# Altium PCB Control_core_PCB.PcbDoc
Units mm, origin at the board's own origin, x right, y up, seen from the top; angles counter-clockwise.
Board outline 38.1 x 22.86 mm, 2 copper layers (Top Layer, Bottom Layer), stack 1.071 mm thick; 23 components, 82 nets, 111 pads, 40 vias.
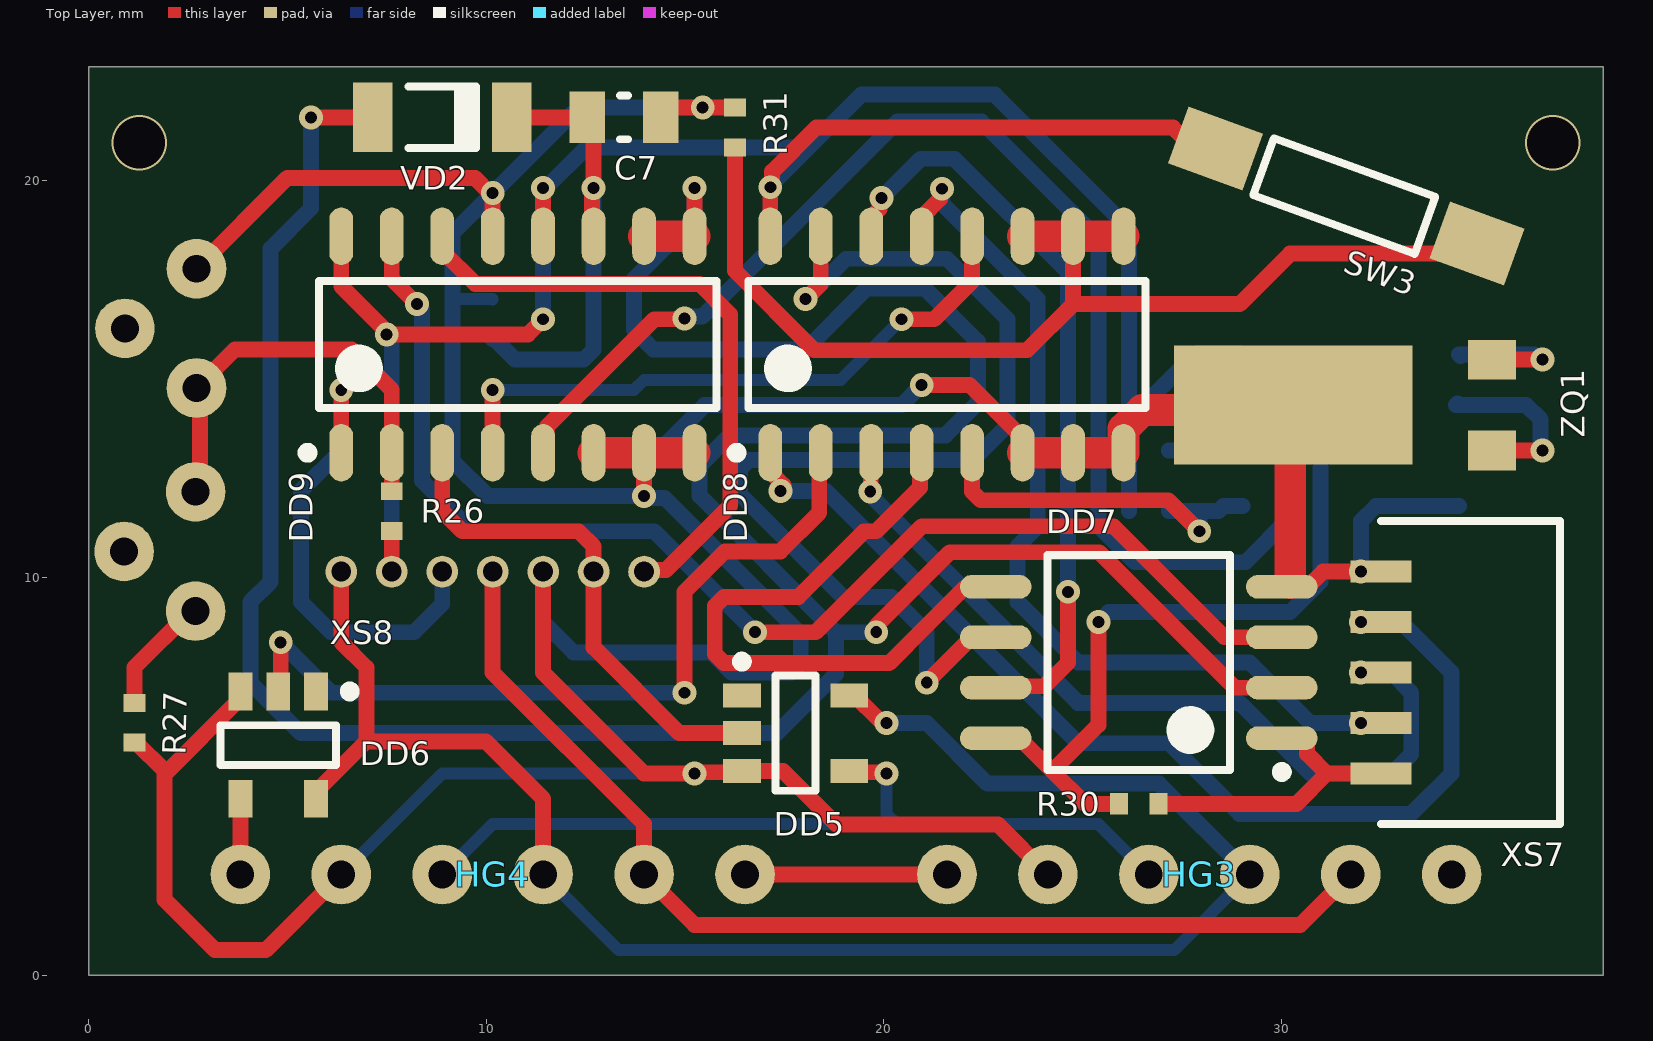
[diagram p0: Top Layer view]
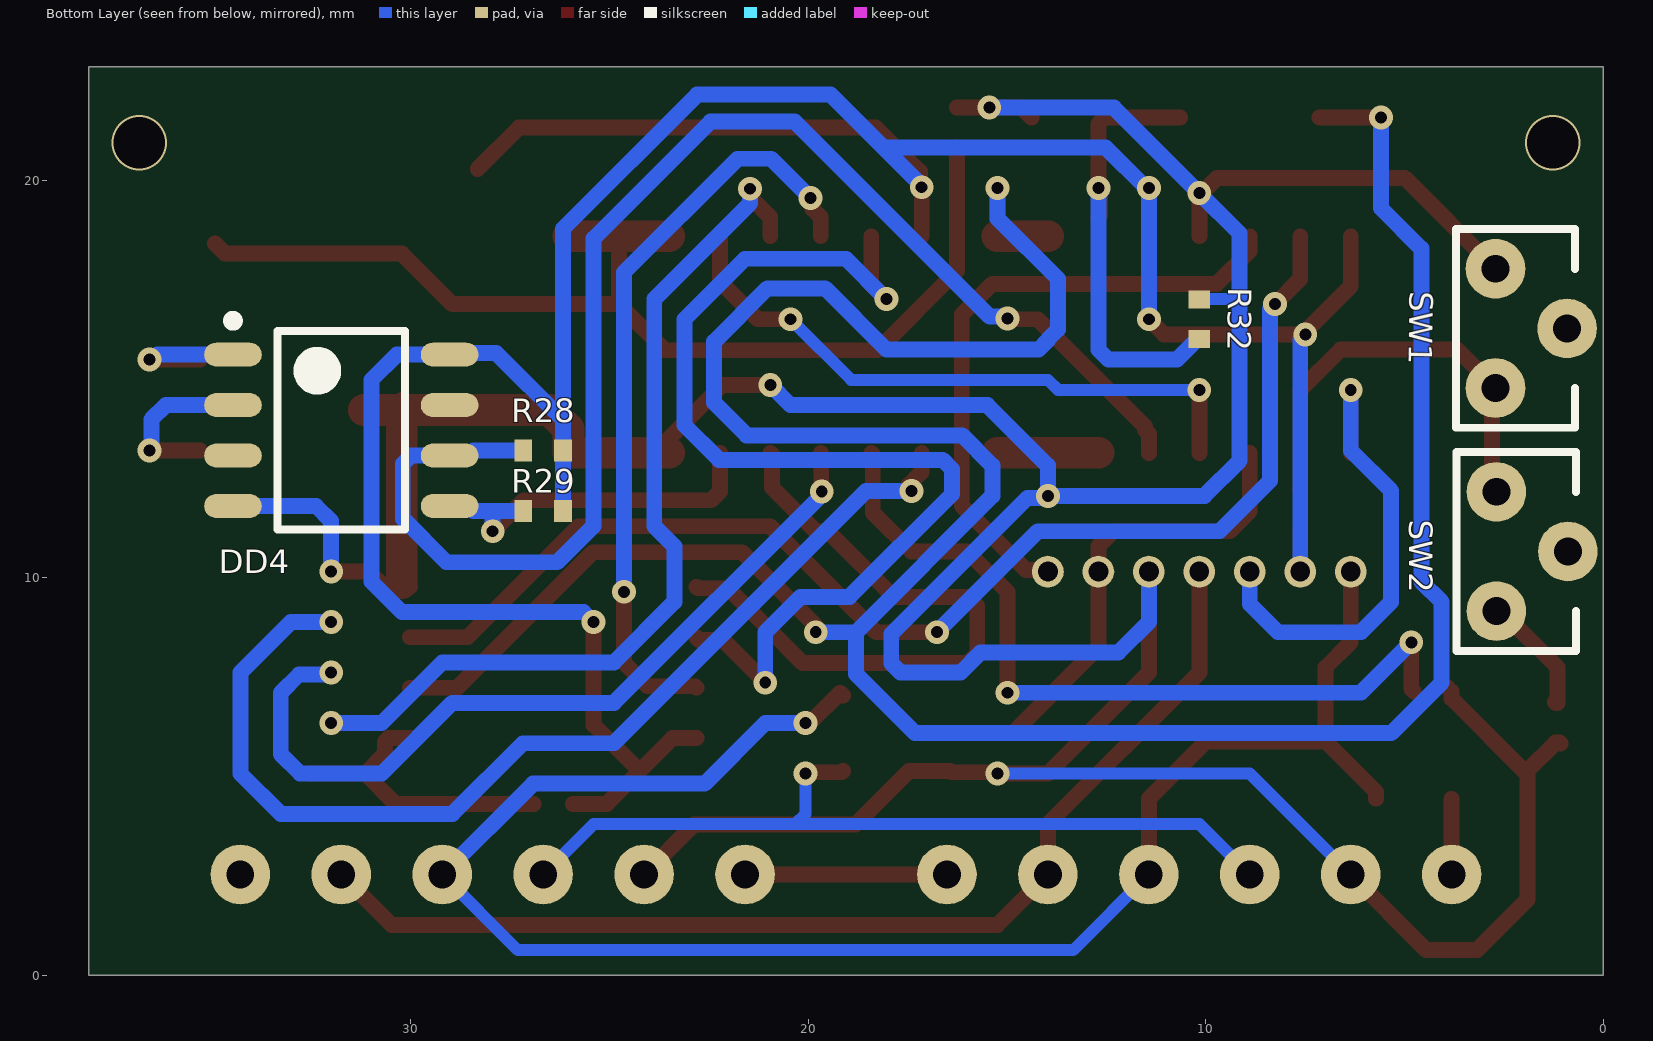
[diagram p1: Bottom Layer view, seen from below]

## Layer stack, top to bottom
Top Solder: solder mask 0.0102, Solder Resist, Dk 3.5
Top Layer: signal copper 0.0356
Dielectric 1: dielectric 1, FR-4, Dk 4.8
Bottom Layer: signal copper 0.0356
Bottom Solder: solder mask 0.0102, Solder Resist, Dk 3.5

## Board outline
0,0 38.1,0 38.1,22.86 0,22.86
cut-out: -25.4,-73.66 -25.146,-73.66 -25.146,-73.406 -25.4,-73.406
cut-out: -25.4,-73.66 -25.146,-73.66 -25.146,-73.406 -25.4,-73.406
cut-out: -25.4,-73.66 -25.146,-73.66 -25.146,-73.406 -25.4,-73.406

## Design rules (kind name [scope] priority, off if disabled: settings)
Clearance [All] p1: gap=0.254 ignorepadtopadclearanceinfootprint=FALSE
FanoutControl Fanout_LCC [All] p1 off: bgadir=Out bgaviamode=Centered fanoutstyle=Auto fanoutdirection=Alternating viagrid=0.025 // Protel DXP Scope 1 Expression Was: IsLCC   Fanout_LCC (Default Rule)
FanoutControl Fanout_BGA [All] p2 off: bgadir=Out bgaviamode=Centered fanoutstyle=Auto fanoutdirection=Alternating viagrid=0.025 // Protel DXP Scope 1 Expression Was: IsBGA   Fanout_BGA (Default Rule)
FanoutControl Fanout_SOIC [All] p3 off: bgadir=Out bgaviamode=Centered fanoutstyle=Auto fanoutdirection=Alternating viagrid=0.025 // Protel DXP Scope 1 Expression Was: IsSOIC   Fanout_SOIC (Default Rule)
FanoutControl Fanout_Default [All] p4: bgadir=Out bgaviamode=Centered fanoutstyle=Auto fanoutdirection=Alternating viagrid=0.025 // Fanout_Default (Default Rule)
FanoutControl Fanout_Small [All] p5 off: bgadir=Out bgaviamode=Centered fanoutstyle=Auto fanoutdirection=Alternating viagrid=0.025 // Protel DXP Scope 1 Expression Was: (CompPinCount < 5)   Fanout_Small (Default Rule)
PolygonConnect [All] p1: connectstyle=Relief reliefconductorwidth=0.254 reliefentries=4 polygonreliefangle="90 Angle" airgapwidth=0.254
RoutingVias [All] p1: holewidth=0.711 width=1.27 viastyle="Through Hole" minholewidth=0.711 minwidth=1.27 maxholewidth=0.711 maxwidth=1.27
SilkToSolderMaskClearance [All] p1 off: minsilkscreentomaskgap=0.254 clearancetoexposedcopper=TRUE // Protel DXP Scope 1 Expression Was: IsPad
SolderMaskExpansion [All] p1: expansion=0.102 istentingtop=FALSE
Width [All] p1: maxlimit=1 minlimit=0.15 preferedwidth=0.4
24 further rules are at their usual default settings.

## Components (designator, comment, footprint, x,y, rotation, side; value= is the part's Value field where it differs from the comment)
C7 "C0805" CHIP-0805 13.462,21.59 r0 top
DD4 "DS1337" SOIC-8 31.75,13.716 r180 bottom
DD5 "74LV1T34" SOT23-5 17.78,6.096 r0 top
DD6 "74LV1T34" SOT23-5 4.765,5.795 r270 top
DD7 "ATtiny85" SOIC-8-ATtiny85 26.416,7.874 r180 top
DD8 "CD4053" SOIC-16 21.59,15.875 r90 top
DD9 "CD4053" SOIC-16 10.795,15.875 r90 top
HG3 "HDSP-2000_SPI" HDSP-2000_SPI 34.29,2.54 r180 top
HG4 "HDSP-2000_SPI" HDSP-2000_SPI 16.51,2.54 r180 top
R26 "R0402" CHIP-0402 7.62,11.684 r270 top
R27 "R0402" CHIP-0402 1.143,6.358 r270 top
R28 "R0402" CHIP-0402 26.67,13.208 r180 bottom
R29 "R0402" CHIP-0402 26.67,11.684 r180 bottom
R30 "R0402" CHIP-0402 26.416,4.318 r180 top
R31 "R0402" CHIP-0402 16.256,21.336 r90 top
R32 "R0402" CHIP-0402 10.16,16.51 r90 bottom
SW1 "Button" BUTTON 2.707,17.78 r270 bottom
SW2 "Button" BUTTON 2.685,12.168 r270 bottom
SW3 "Switch" SWITCH 34.925,18.415 r160 top
VD2 "BAS85" DIOD_MELF 8.89,21.59 r180 top
XS7 "Prog_connector" Prog_connector 32.512,5.08 r90 top
XS8 "Socket_7" SOCKET_7 6.35,10.16 r0 top
ZQ1 "HZ" HZ 35.306,14.351 r90 top

## Footprints (in the part's own frame and the unit in brackets; to place one, negate y for a bottom-side part, rotate by r counter-clockwise, add the part's x,y. Pads: shape width x height; smd on the part's side, far side on the other; paste and mask are expansions set on the pad)
BUTTON [mm]
  round 1.5 hole 0.7: 1(0,0) 2(3,0) 3(1.5,1.8)
  silkscreen extent -1,-1 4,2
CHIP-0402 [mm] "Chip Resistor, 2-Leads, Body 1,00x0,50mm, IPC Medium Density"
  rect 0.45x0.55 smd: 1(-0.5,0) 2(0.5,0)
  body extent -0.5,-0.25 0.5,0.25, height 0.35
CHIP-0805 [mm] "Chip Resistor, 2-Leads, Body 2,00x1,25mm, IPC Medium Density"
  rect 0.9x1.3 smd: 1(-0.925,0) 2(0.925,0)
  silkscreen extent -0.1,-0.55 0.1,0.55, body extent -1,-0.63 1,0.63, height 0.7
DIOD_MELF [mm] "MELF Diode, 2-Leads, Body 3,50x1,53mm, IPC Medium Density"
  rect 1x1.75 smd: 1(-1.75,0) 2(1.75,0)
  silkscreen extent -0.85,-0.77 0.85,0.77, body extent -1.85,-0.8 1.85,0.8, height 1.59
HDSP-2000_SPI [mm]
  round 1.5 hole 0.7: 7(0,0) 8(2.54,0) 9(5.08,0) 10(7.62,0) 11(10.16,0) 12(12.7,0)
HZ [mm]
  rect 1x1.2 smd: 1(-1.143,0) 2(1.143,0)
  rect 3x6 smd: 3(0,5)
Prog_connector [mm]
  rect 0.55x1.524 smd: 1(0,0) 2(1.27,0) 3(2.54,0) 4(3.81,0) 5(5.08,0)
  silkscreen extent -1.27,-4.5 6.35,0
SOCKET_7 [mm]
  round 0.8 hole 0.5: 1(0,0) 2(1.27,0) 3(2.54,0) 4(3.81,0) 5(5.08,0) 6(6.35,0) 7(7.62,0)
SOIC-8 [mm] "SOIC, 8-Leads, Body 4,88x3,90mm, Pitch 1,27mm, IPC Medium Density"
  oval 1.45x0.6 smd: 1(-2.725,1.905) 2(-2.725,0.635) 3(-2.725,-0.635) 4(-2.725,-1.905) 5(2.725,-1.905) 6(2.725,-0.635) 7(2.725,0.635) 8(2.725,1.905)
  silkscreen extent -2.85,-2.5 1.6,2.88, body extent -2,-2.5 2,2.5, height 1.75
SOIC-8-ATtiny85 [mm] "SOIC, 8-Leads, Body 5,24x5,29mm, Pitch 1,27mm, IPC Medium Density"
  oval 1.8x0.6 smd: 1(-3.6,1.905) 2(-3.6,0.635) 3(-3.6,-0.635) 4(-3.6,-1.905) 5(3.6,-1.905) 6(3.6,-0.635) 7(3.6,0.635) 8(3.6,1.905)
  silkscreen extent -3.73,-2.7 2.3,2.88, body extent -2.7,-2.7 2.7,2.7, height 1.75
SOIC-16 [mm] "SOIC, 16-Leads, Body 9,90x3,90mm, Pitch 1,27mm, IPC Medium Density"
  oval 1.45x0.6 smd: 1(-2.725,4.445) 2(-2.725,3.175) 3(-2.725,1.905) 4(-2.725,0.635) 5(-2.725,-0.635) 6(-2.725,-1.905) 7(-2.725,-3.175) 8(-2.725,-4.445) 9(2.725,-4.445) 10(2.725,-3.175) 11(2.725,-1.905) 12(2.725,-0.635) 13(2.725,0.635) 14(2.725,1.905) 15(2.725,3.175) 16(2.725,4.445)
  silkscreen extent -2.85,-5 1.6,5.42, body extent -2,-5 2,5, height 1.75
SOT23-5 [mm] "SOT23, 5-Leads, Body 2,85x2,80mm, Pitch 0,95mm, IPC Medium Density"
  rect 0.95x0.6 smd: 1(-1.35,0.95) 2(-1.35,0) 3(-1.35,-0.95) 4(1.35,-0.95) 5(1.35,0.95)
  silkscreen extent -1.47,-1.45 0.5,1.92, body extent -0.87,-1.45 0.87,1.45, height 1.1
SWITCH [mm]
  rect 2x1.524 smd: 1(0,0) 2(7,0)

## Via types
v1: diameter 0.6, hole 0.3, Top Layer to Bottom Layer, 38 vias
v2: diameter 1.4, hole 1.3, Top Layer to Bottom Layer, 2 vias

## Nets (pads, with @x,y where several pads share a name; then routed paths per layer and width w, separated by ;. In a path a pad name is that pad's centre, name@x,y a point inside that pad or via, vN(x,y) a via of type N, cw(c..) or ccw(c..) an arc to the next point about the centre after c; other vN are vias at no path point)
+3V3: DD4.8 DD7.8 DD8.16 DD9.12 DD9.16 R26.2 R28.2 R29.2 R30.2 SW3.2 XS8.2 | length 82.7
  Top Layer w0.4: DD9.16 6.35,17.34 7.561,16.129 11.049,16.129 v1(11.43,16.51) ; XS8.2 R26.2 ; DD9.12 v1(11.43,19.812) ; DD8.16 v1(17.145,19.832) 17.193,19.88 17.193,20.225 18.304,21.336 27.274,21.336 SW3.2@28.315,20.295 ; DD7.8 23.416,5.969 24.242,5.143 ; v1(25.4,8.89) 25.4,6.302 24.242,5.143 ; R30.2 25.067,4.318 24.242,5.143
  Bottom Layer w0.4: v1(7.493,16.129) 7.62,16.002 XS8.2 ; v1(11.43,16.51) v1(11.43,19.812) 11.498,19.812 12.514,20.828 18.103,20.828 ; v1(17.145,19.832) 17.145,19.87 18.103,20.828 ; v1(25.4,8.89) 25.654,9.144 30.226,9.144 30.988,9.906 30.988,14.986 30.353,15.621 DD4.8 28.987,15.659 27.851,15.659 26.17,13.978 ; R29.2 R28.2 26.17,13.978 ; 18.103,20.828 19.436,22.161 22.797,22.161 26.17,18.788 26.17,13.978
+3V3_D: 
+3V3_S: 
+5: DD5.5 DD6.5 HG3.9 HG4.9 XS8.1 | length 44.8
  Top Layer w0.4: DD6.5 5.715,4.62 6.985,5.89 ; XS8.1 6.35,8.382 6.985,7.747 6.985,5.89 ; HG4.9 11.43,4.445 9.985,5.89 6.985,5.89 ; DD5.5 19.196,7.112 19.958,6.35 v1(20.066,6.35)
  Bottom Layer w0.3: HG4.9 13.335,0.635 27.305,0.635 HG3.9
  Bottom Layer w0.4: v1(20.066,6.35) 21.082,6.35 22.606,4.826 26.924,4.826 HG3.9
+5_D: 
+5_S: 
ADC_IN: DD7.3 DD9.15 | length 31.9
  Top Layer w0.4: DD9.15 7.62,17.526 v1(8.255,16.891) ; v1(16.764,8.636) 18.288,8.636 20.955,11.303 25.781,11.303 28.575,8.509 DD7.3
  Bottom Layer w0.4: v1(8.255,16.891) 8.382,16.764 8.382,12.446 9.652,11.176 14.224,11.176 v1(16.764,8.636)
BAT_DIV: 
BAT_IN: DD9.1 XS8.3 | length 12.3
  Top Layer w0.4: DD9.1 v1(6.35,14.732)
  Bottom Layer w0.4: v1(6.35,14.732) 6.35,13.208 5.334,12.192 5.334,9.398 6.096,8.636 8.181,8.636 8.89,9.345 XS8.3
BATTERY: 
Buttons: DD9.2 R26.1 SW1.2 SW2.1 | length 11
  Top Layer w0.4: SW2.1 2.794,12.277 2.794,14.693 SW1.2 3.675,15.748 6.604,15.748 7.62,14.732 DD9.2 R26.1
BYTE: DD6.4 HG4.12 | length 1.9
  Top Layer w0.4: HG4.12 3.813,2.543 3.813,4.443 DD6.4
CLK: 
CLK_BUS: DD8.12 DD9.4 | length 15.9
  Top Layer w0.4: DD9.4 v1(10.16,14.732) ; v1(20.447,16.51) 21.267,16.51 22.225,17.468 DD8.12
  Bottom Layer w0.3: v1(10.16,14.732) 13.716,14.732 13.97,14.986 18.923,14.986 v1(20.447,16.51)
CLK_PROG: DD8.13 XS7.2 | length 22.9
  Top Layer w0.4: DD8.13 20.955,19.079 21.415,19.539 21.415,19.747 v1(21.463,19.795)
  Bottom Layer w0.4: v1(21.463,19.795) 21.463,19.431 23.876,17.018 23.876,11.303 23.368,10.795 23.368,9.398 24.892,7.874 29.21,7.874 30.734,6.35 v1(32.004,6.35)
Col1: 
Col2: 
Col3: 
Col4: 
Col5: 
D_OUT: DD6.2 DD8.2 | length 20.2
  Top Layer w0.4: DD6.2 4.826,7.206 v1(4.826,8.382) ; v1(14.986,7.112) 14.986,9.652 16.002,10.668 17.399,10.668 18.377,11.646 18.377,13.112 DD8.2
  Bottom Layer w0.4: v1(4.826,8.382) 6.096,7.112 v1(14.986,7.112)
DATA: HG3.12 HG4.7 | length 5.1
  Top Layer w0.4: HG4.7 HG3.12
GATE: DD9.14 XS8.7 | length 15.9
  Top Layer w0.4: DD9.14 8.89,18.229 9.72,17.399 15.367,17.399 16.138,16.628 16.138,11.82 14.518,10.2 14.01,10.2 XS8.7
Gate1: 
Gate2: 
Gate3: 
Gate4: 
Gate5: 
GATE_S: 
GND: C7.2 DD4.4 DD5.3 DD6.3 DD7.4 DD8.6 DD8.7 DD8.8 DD9.6 DD9.7 DD9.8 DD9.13 HG3.11 HG4.11 R27.2 R31.2 R32.2 SW1.1 XS7.5 XS8.5 ZQ1.3 | length 121.1
  Top Layer w0.4: R27.2@1.068,5.833 1.093,5.858 R27.2 1.193,5.858 1.905,5.146 1.905,5.06 ; SW1.1 4.993,20.066 9.711,20.066 10.092,19.685 v1(10.16,19.685) DD9.13 ; DD6.3@3.915,7.245 DD6.3 3.815,6.97 1.905,5.06 ; HG4.11 4.445,0.635 3.175,0.635 1.905,1.905 1.905,5.06 ; XS8.5 11.43,7.62 13.97,5.08 v1(15.24,5.08) 15.273,5.113 16.397,5.113 DD5.3 17.46,5.146 18.813,3.793 22.877,3.793 HG3.11 ; v1(13.97,12.065) DD9.7 ; C7.2 14.633,21.836 R31.2 ; v1(20.955,14.859) 22.157,14.859 23.341,13.675 23.495,13.521 DD8.6 ; DD7.4 DD7.4@30.134,9.779 ; DD7.4@30.226,9.871 DD7.4@30.134,9.779 ; ZQ1.3@30.226,14.224 ZQ1.3@30.226,14.478 ; v1(32.004,10.16) 31.051,10.16 30.67,9.779 DD7.4@30.134,9.779
  Top Layer w0.8: DD9.6 DD9.7 DD9.8 ; DD8.6 DD8.7 DD8.8 26.035,13.755 26.504,14.224 ZQ1.3@30.226,14.224 ; DD7.4@30.226,9.871 ZQ1.3@30.226,14.224 ; ZQ1.3@31.179,14.224 ZQ1.3@30.226,14.224
  Bottom Layer w0.3: HG4.11 8.89,5.08 v1(15.24,5.08) ; 9.144,17.018 10.152,17.018 R32.2
  Bottom Layer w0.4: XS8.5 11.43,8.89 12.192,8.128 15.662,8.128 16.17,7.62 17.677,7.62 17.911,7.854 17.911,8.591 14.485,12.017 14.018,12.017 v1(13.97,12.065) ; v1(15.445,21.836) 12.311,21.836 v1(10.16,19.685) 9.144,18.669 9.144,17.018 9.144,12.954 10.033,12.065 v1(13.97,12.065) ; v1(20.955,14.859) 20.447,14.351 15.494,14.351 13.97,12.827 v1(13.97,12.065) ; v1(32.004,10.16) 32.004,11.43 32.385,11.811 DD4.4
GND_D: 
GND_S: 
HCLK: DD5.4 HG3.10 HG4.10 | length 21.3
  Top Layer w0.4: DD5.4 19.163,5.113 19.977,5.113 20.066,5.024 v1(20.066,5.08) ; HG3.10 HG3.10@26.71,2.58
  Bottom Layer w0.3: HG4.10 10.16,3.81 20.32,3.81 ; v1(20.066,5.08) 20.066,4.064 20.32,3.81 ; HG3.10 25.4,3.81 20.32,3.81
MISO_PROG: DD8.1 XS7.4 | length 27.2
  Top Layer w0.4: DD8.1 17.145,12.671 17.478,12.338 17.478,12.271 v1(17.399,12.192)
  Bottom Layer w0.4: v1(17.399,12.192) 18.542,12.192 24.892,5.842 27.178,5.842 28.956,4.064 33.274,4.064 34.29,5.08 34.29,7.62 33.02,8.89 v1(32.004,8.89)
MOSI_PROG: DD8.3 XS7.3 | length 20.8
  Top Layer w0.4: v1(19.661,12.175) 19.673,12.187 19.673,13.138 DD8.3
  Bottom Layer w0.4: v1(19.661,12.175) 19.661,12.089 24.892,6.858 28.956,6.858 30.734,5.08 32.786,5.08 33.274,5.568 33.274,7.112 32.814,7.572 32.052,7.572 v1(32.004,7.62)
NetC1_2: 
NetC2_2: 
NetC3_2: 
NetC7_1: C7.1 DD9.11 R32.1 VD2.1 | length 11.4
  Top Layer w0.4: VD2.1 C7.1 12.7,21.427 v1(12.7,19.812) 12.662,19.774 12.662,19.117 DD9.11@12.7,19.079
  Bottom Layer w0.4: R32.1 10.21,16.01 10.726,15.494 12.446,15.494 12.7,15.748 v1(12.7,19.812)
NetC8_2: 
NetDA1_1: 
NetDA1_4: 
NetDA1_5: 
NetDA2_1: 
NetDA2_3: 
NetDD1_4: 
NetDD1_5: 
NetDD1_6: 
NetDD4_1: DD4.1 ZQ1.2 | length 3.5
  Top Layer w0.4: ZQ1.2 v1(36.576,15.494)
  Bottom Layer w0.4: DD4.1@34.513,15.583 DD4.1 36.381,15.621 36.508,15.494 v1(36.576,15.494)
NetDD4_2: DD4.2 ZQ1.1 | length 4.4
  Top Layer w0.4: ZQ1.1 v1(36.576,13.208)
  Bottom Layer w0.4: DD4.2@34.398,14.351 34.437,14.389 DD4.2 36.167,14.351 36.528,13.99 36.528,13.256 v1(36.576,13.208)
NetDD7_5: DD7.5 DD8.4 | length 16.5
  Top Layer w0.4: DD8.4 20.917,13.112 20.917,12.281 19.812,11.176 19.506,11.176 17.855,9.525 15.982,9.525 15.748,9.291 15.748,8.091 15.982,7.857 20.135,7.857 21.082,8.804 22.018,9.741 22.778,9.741 DD7.5
NetDD7_6: DD7.6 DD8.15 | length 28
  Top Layer w0.4: v1(18.034,17.018) 18.415,17.399 DD8.15 ; v1(21.082,7.366) 21.082,7.375 22.151,8.444 22.751,8.444 DD7.6
  Bottom Layer w0.4: v1(18.034,17.018) 19.05,18.034 21.59,18.034 23.114,16.51 23.114,13.843 22.242,12.971 16.617,12.971 16.383,12.737 16.383,12.106 18.964,9.525 20.193,9.525 21.082,8.636 v1(21.082,7.366)
NetDD7_7: DD7.7 DD8.14 | length 19.3
  Top Layer w0.4: DD8.14 19.685,19.079 19.891,19.285 19.891,19.51 v1(19.939,19.558) ; DD7.7 22.854,7.277 24.041,7.277 24.638,7.874 v1(24.638,9.652)
  Bottom Layer w0.4: v1(19.939,19.558) 20.93,20.549 21.775,20.549 24.638,17.686 v1(24.638,9.652)
NetDD8_9: DD8.9 DD8.10 DD8.11 R31.1 SW3.1 | length 28
  Top Layer w0.4: R31.1 16.256,17.73 18.255,15.731 23.605,15.731 24.765,16.891 ; DD8.10 24.765,16.891 ; SW3.1 34.671,18.161 30.226,18.161 28.956,16.891 24.765,16.891
  Top Layer w0.8: DD8.11 DD8.10 DD8.9
NetG1_1: 
NetHG1_1: 
NetHG1_2: 
NetHG1_3: 
NetHG1_4: 
NetHG1_5: 
NetHL1_1: 
NetR1_1: 
NetR3_2: 
NetR6_1: 
NetR7_2: 
NetR9_1: 
NetR10_2: 
NetR13_1: 
NetR14_2: 
NetR16_1: 
NetR17_2: 
NetR21_2: 
NetR27_1: R27.1 SW2.2 | length 3.1
  Top Layer w0.4: R27.1@1.215,6.883 1.19,6.858 R27.1 1.143,7.747 2.564,9.168 SW2.2
NetXS5_2: 
NetXS5_4: 
PWM: HG3.8 HG4.8 XS8.4 | length 28
  Top Layer w0.4: XS8.4 10.16,7.62 13.97,3.81 HG4.8 15.24,1.27 30.48,1.27 HG3.8
PWM_D: 
RESET: DD7.1 R30.1 XS7.1 | length 7.6
  Top Layer w0.4: R30.1 30.388,4.318 31.15,5.08 ; DD7.1 30.562,5.969 30.654,5.877 30.654,5.576 31.15,5.08 ; XS7.1 31.15,5.08
SCL: DD4.6 DD9.5 R28.1 | length 36.4
  Top Layer w0.4: DD9.5 11.43,13.629 11.53,13.729 11.53,13.816 14.224,16.51 14.969,16.51 v1(14.986,16.527)
  Bottom Layer w0.4: v1(14.986,16.527) 15.034,16.575 15.432,16.575 20.339,21.482 22.46,21.482 25.4,18.542 25.4,11.312 26.315,10.397 29.102,10.397 30.204,11.499 30.204,12.869 29.992,13.081 DD4.6 28.546,13.081 28.419,13.208 R28.1
SCLK: DD5.2 DD9.3 XS8.6 | length 12.8
  Top Layer w0.4: DD9.3 8.89,11.684 9.398,11.176 12.319,11.176 12.7,10.795 XS8.6 12.7,8.255 14.859,6.096 DD5.2
SDA: DD4.5 DD8.5 R29.1 | length 9.6
  Top Layer w0.4: DD8.5 22.225,12.172 22.44,11.957 27.159,11.957 v1(27.94,11.176)
  Bottom Layer w0.4: R29.1@27.195,11.728 27.17,11.703 R29.1 27.94,11.684 ; v1(27.94,11.176) 27.94,11.684 ; DD4.5 28.546,11.811 28.419,11.684 27.94,11.684
SWITCH: DD7.2 DD9.9 DD9.10 VD2.2 | length 78.4
  Top Layer w0.4: v1(5.588,21.59) VD2.2 ; DD9.9 v1(15.24,19.812) ; v1(19.812,8.636) 19.812,8.799 21.662,10.649 25.419,10.649 28.829,7.239 DD7.2
  Top Layer w0.8: DD9.10 DD9.9
  Bottom Layer w0.4: v1(5.588,21.59) 5.588,19.304 4.572,18.288 4.572,9.906 4.064,9.398 4.064,7.366 5.334,6.096 17.312,6.096 18.796,7.58 18.796,8.636 ; v1(15.24,19.812) 15.24,19.05 13.716,17.526 13.716,16.256 13.97,16.002 13.97,15.982 14.204,15.748 18.034,15.748 19.575,17.289 21.028,17.289 22.369,15.948 22.369,14.409 21.549,13.589 16.129,13.589 15.367,12.827 15.367,12.065 18.796,8.636 ; v1(19.812,8.636) 18.796,8.636
pads on no net: DD4.3 DD4.7 DD5.1 DD6.1 HG3.7 SW1.3 SW2.3
copper on no net:
  other v2: 1.27,20.955 36.83,20.955

## Silkscreen, mask and mechanical layers (free items; w line width, h text height)
Top Overlay:
  lines w0.2: 29.298,19.631 33.355,18.155 33.877,19.587 29.819,21.064 29.298,19.631
Mechanical 15:
  lines w0.2: 26.67,22.86 26.67,16.764 29.527,16.764 35.242,16.764 38.1,16.764 ; 0,0 0,22.86 2.54,22.86 6.35,22.86 38.1,22.86 38.1,0 0,0